# EAGLE board usb_board (EAGLE 6.4)
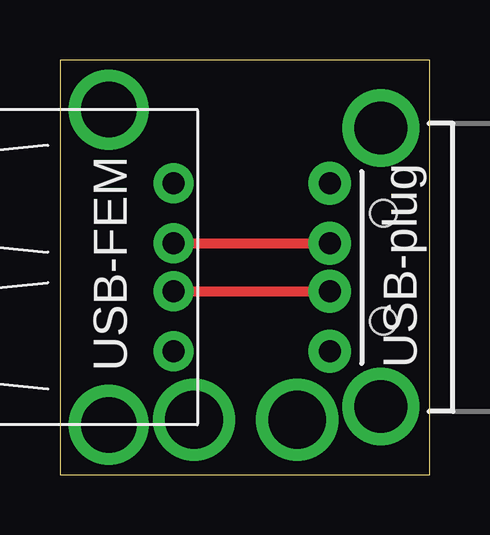
[diagram p0: board, top side]
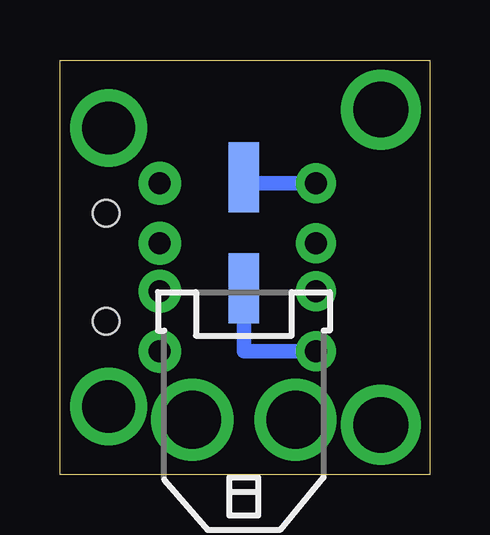
[diagram p1: board, bottom side, seen from below]

Size 15.42 x 17.27 mm. Coordinates in mm from the lower left corner, seen from the top.
Outline: 0,0 15.42,0 15.42,17.27 0,17.27 0,0
Copper layers (1*16): Top 0.035mm / dielectric 1.5mm / Bottom 0.035mm
Design rules "SparkFun": minimum track width 8mil, minimum drill 20mil, track to track 8mil, track to pad 8mil, pad to pad 8mil, via to via 8mil, smd to smd 8mil, copper to edge 10mil, drill to drill 8mil, minimum pad ring 12mil, minimum via ring 10mil, stop-mask expansion 4mil, vias tented up to drill 25mil, thermal gap 10mil
Net classes: 0 default: width 0.381 mm, drill 0.254 mm, clearance 0.254 mm; 1 power: width 0.61 mm, drill 0.508 mm, clearance 0.508 mm

## Footprints (pad centres in the part's own frame; a part is rotated, then mirrored left to right if it is on the bottom)
USB-A-S = drill 0.914 pad 1.676: D+ 2.71,-1; D- 2.71,1; GND 2.71,-3.5; VCC 2.71,3.5 | drill 2.311: P$5 0,-6.566; P$6 0,6.566
USB-A-H = drill 0.914 pad 1.778: D+ 2.13,1; D- 2.13,-1; GND 2.13,3.5; VBUS 2.13,-3.5 | drill 2.2: GND2 0,-5.8; GND3 0,5.8 | hole 1.1: -0.1,2.25; -0.1,-2.25
43045-0206 = smd 1.27 x 2.92: P$1 0,5.47; P$2 0,10.1 | drill 2.41: P$3 -2.15,0; P$4 2.15,0

## Placement (x,y rotation side)
U$1  USB-A_FEM  [USB-A-S]  2.03,8.64 0 top
U$2  USB-A-PLUG  [USB-A-H]  13.39,8.64 180 top
X3  [43045-0206]  7.75,2.29 0 bottom

## Library data of the parts
U$1 U$2 = ngohara_parts
X3 = con-molex-micro-fit-3_0

## Nets
GND [power]: U$1.GND X3.P$1
N$3: U$1.D+ U$2.D+
N$4: U$1.D- U$2.D-
VCC [power]: U$1.VCC X3.P$2

## Tracks (layer width: path | path; a pad name or v marks a point on that pad's centre or on a via)
GND
  Bottom 0.61: U$1.GND 7.75,5.14 X3.P$1
N$3
  Top 0.406: U$1.D+ U$2.D+
N$4
  Top 0.406: U$1.D- U$2.D-
VCC
  Bottom 0.61: U$1.VCC 7.77,12.14 X3.P$2

## Text on the board
_tsilk: USB-plug | USB-FEM